# EAGLE board 24x16_RGB_Top (EAGLE 6.5.0)
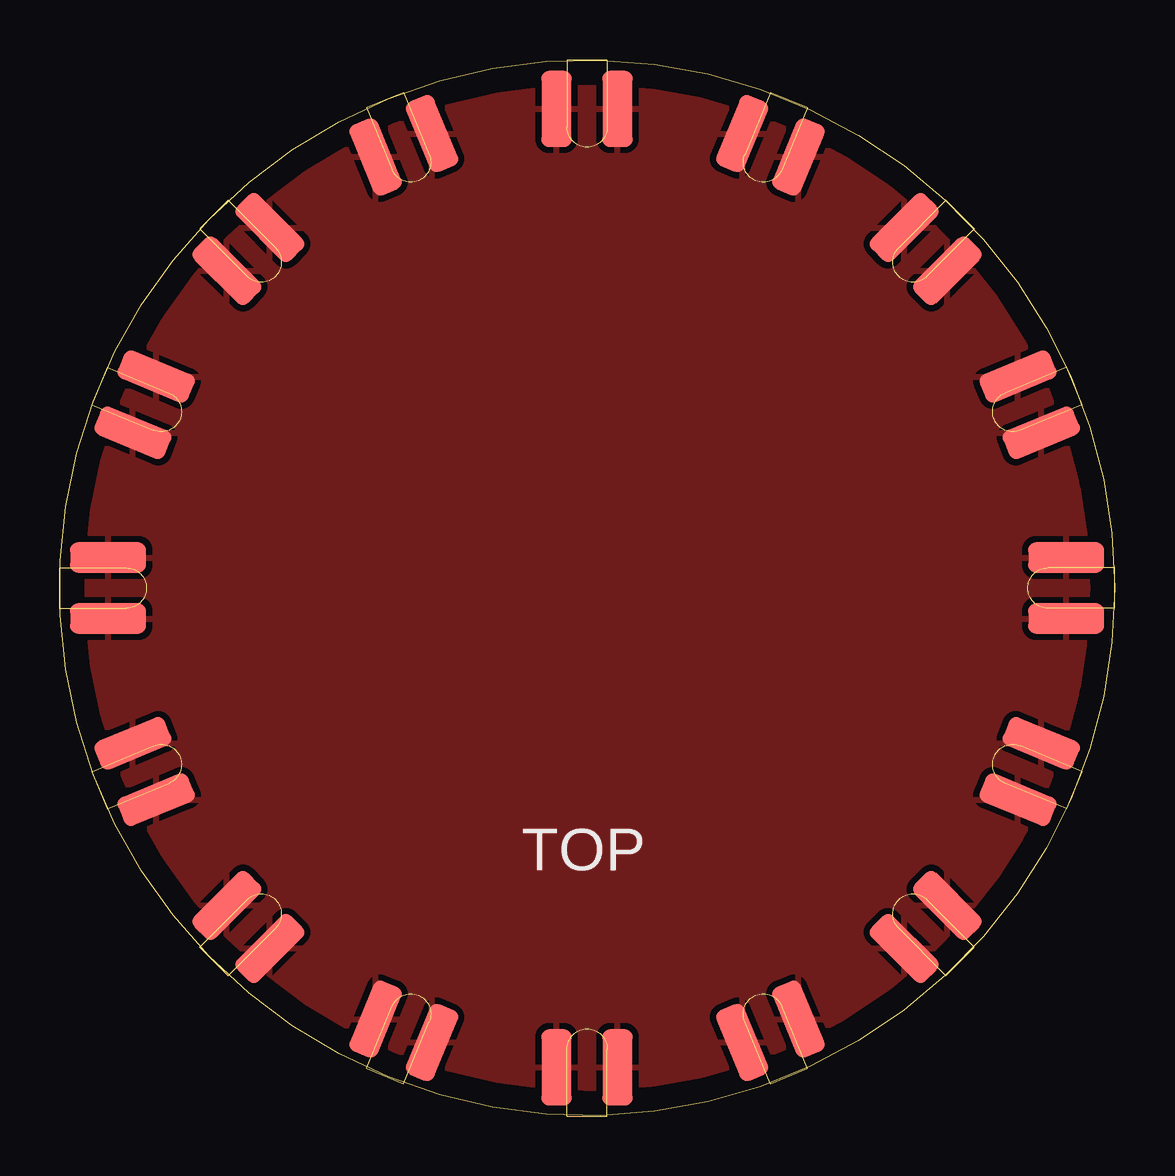
[diagram p0: board, top side]
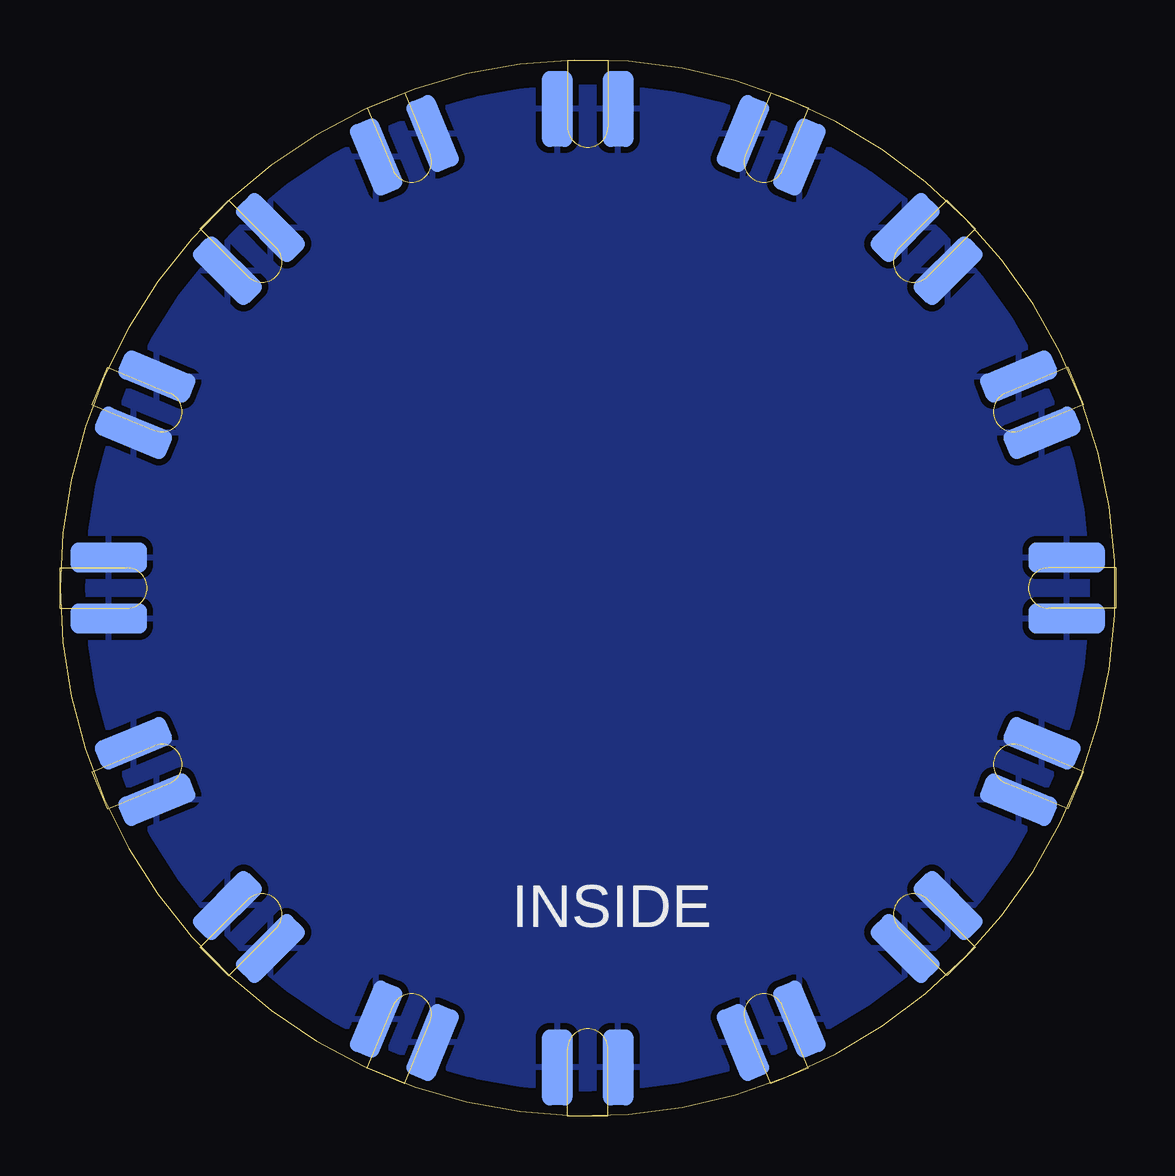
[diagram p1: board, bottom side, seen from below]

Size 43.97 x 43.99 mm. Coordinates in mm from the lower left corner, seen from the top.
Outline: 43.97,21.98 arc-360 43.97,22
Copper layers (1*16): Top 0.035mm / dielectric 1.5mm / Bottom 0.035mm
Design rules "default": minimum track width 10mil, minimum drill 24mil, track to track 8mil, track to pad 8mil, pad to pad 8mil, via to via 8mil, smd to smd 8mil, copper to edge 40mil, drill to drill 8mil, minimum pad ring 10mil, minimum via ring 8mil, stop-mask expansion 4mil, vias tented up to drill 0mil, thermal gap 10mil

## Footprints (pad centres in the part's own frame; a part is rotated, then mirrored left to right if it is on the bottom)
SLOT = smd 3.175 x 1.27: P$1 2.032,1.27; P$2 2.032,-1.27 | smd 3.175 x 1.27 bottom: P$3 2.032,1.27; P$4 2.032,-1.27

## Placement (x,y rotation side)
SLOT1  SLOT  [SLOT]  43.97,21.98 180 top
SLOT2  SLOT  [SLOT]  42.3,30.4 202.5 top
SLOT3  SLOT  [SLOT]  37.53,37.54 225 top
SLOT4  SLOT  [SLOT]  30.39,42.31 247.5 top
SLOT5  SLOT  [SLOT]  21.97,43.98 270 top
SLOT6  SLOT  [SLOT]  13.55,42.31 292.5 top
SLOT7  SLOT  [SLOT]  6.41,37.54 315 top
SLOT8  SLOT  [SLOT]  1.65,30.4 337.5 top
SLOT9  SLOT  [SLOT]  -0.03,21.98 0 top
SLOT10  SLOT  [SLOT]  1.65,13.56 22.5 top
SLOT11  SLOT  [SLOT]  6.41,6.43 45 top
SLOT12  SLOT  [SLOT]  13.55,1.66 67.5 top
SLOT13  SLOT  [SLOT]  21.97,-0.02 90 top
SLOT14  SLOT  [SLOT]  30.39,1.66 112.5 top
SLOT15  SLOT  [SLOT]  37.53,6.43 135 top
SLOT16  SLOT  [SLOT]  42.3,13.56 157.5 top

## Library data of the parts
SLOT1-SLOT16 = slice; OC_NEWARK: unknown

## Nets
BLANK: SLOT1.P$3 SLOT1.P$4 SLOT2.P$3 SLOT2.P$4 SLOT3.P$3 SLOT3.P$4 SLOT4.P$3 SLOT4.P$4 SLOT5.P$3 SLOT5.P$4 SLOT6.P$3 SLOT6.P$4 SLOT7.P$3 SLOT7.P$4 SLOT8.P$3 SLOT8.P$4 SLOT9.P$3 SLOT9.P$4 SLOT10.P$3 SLOT10.P$4 SLOT11.P$3 SLOT11.P$4 SLOT12.P$3 SLOT12.P$4 SLOT13.P$3 SLOT13.P$4 SLOT14.P$3 SLOT14.P$4 SLOT15.P$3 SLOT15.P$4 SLOT16.P$3 SLOT16.P$4
GND: SLOT1.P$1 SLOT1.P$2 SLOT2.P$1 SLOT2.P$2 SLOT3.P$1 SLOT3.P$2 SLOT4.P$1 SLOT4.P$2 SLOT5.P$1 SLOT5.P$2 SLOT6.P$1 SLOT6.P$2 SLOT7.P$1 SLOT7.P$2 SLOT8.P$1 SLOT8.P$2 SLOT9.P$1 SLOT9.P$2 SLOT10.P$1 SLOT10.P$2 SLOT11.P$1 SLOT11.P$2 SLOT12.P$1 SLOT12.P$2 SLOT13.P$1 SLOT13.P$2 SLOT14.P$1 SLOT14.P$2 SLOT15.P$1 SLOT15.P$2 SLOT16.P$1 SLOT16.P$2

## Tracks (layer width: path | path; a pad name or v marks a point on that pad's centre or on a via)
BLANK
  pour Bottom: -24.96,68.98 -24.96,-24.36 70.43,-24.36 70.43,68.98
GND
  pour Top: 69.69,68.32 69.56,-25.46 69.41,-23.93 -24.9,-23.93 -24.62,68.53

## Text on the board
tPlace: TOP
bPlace: INSIDE